# Allegro board KSZ_02v4.brd
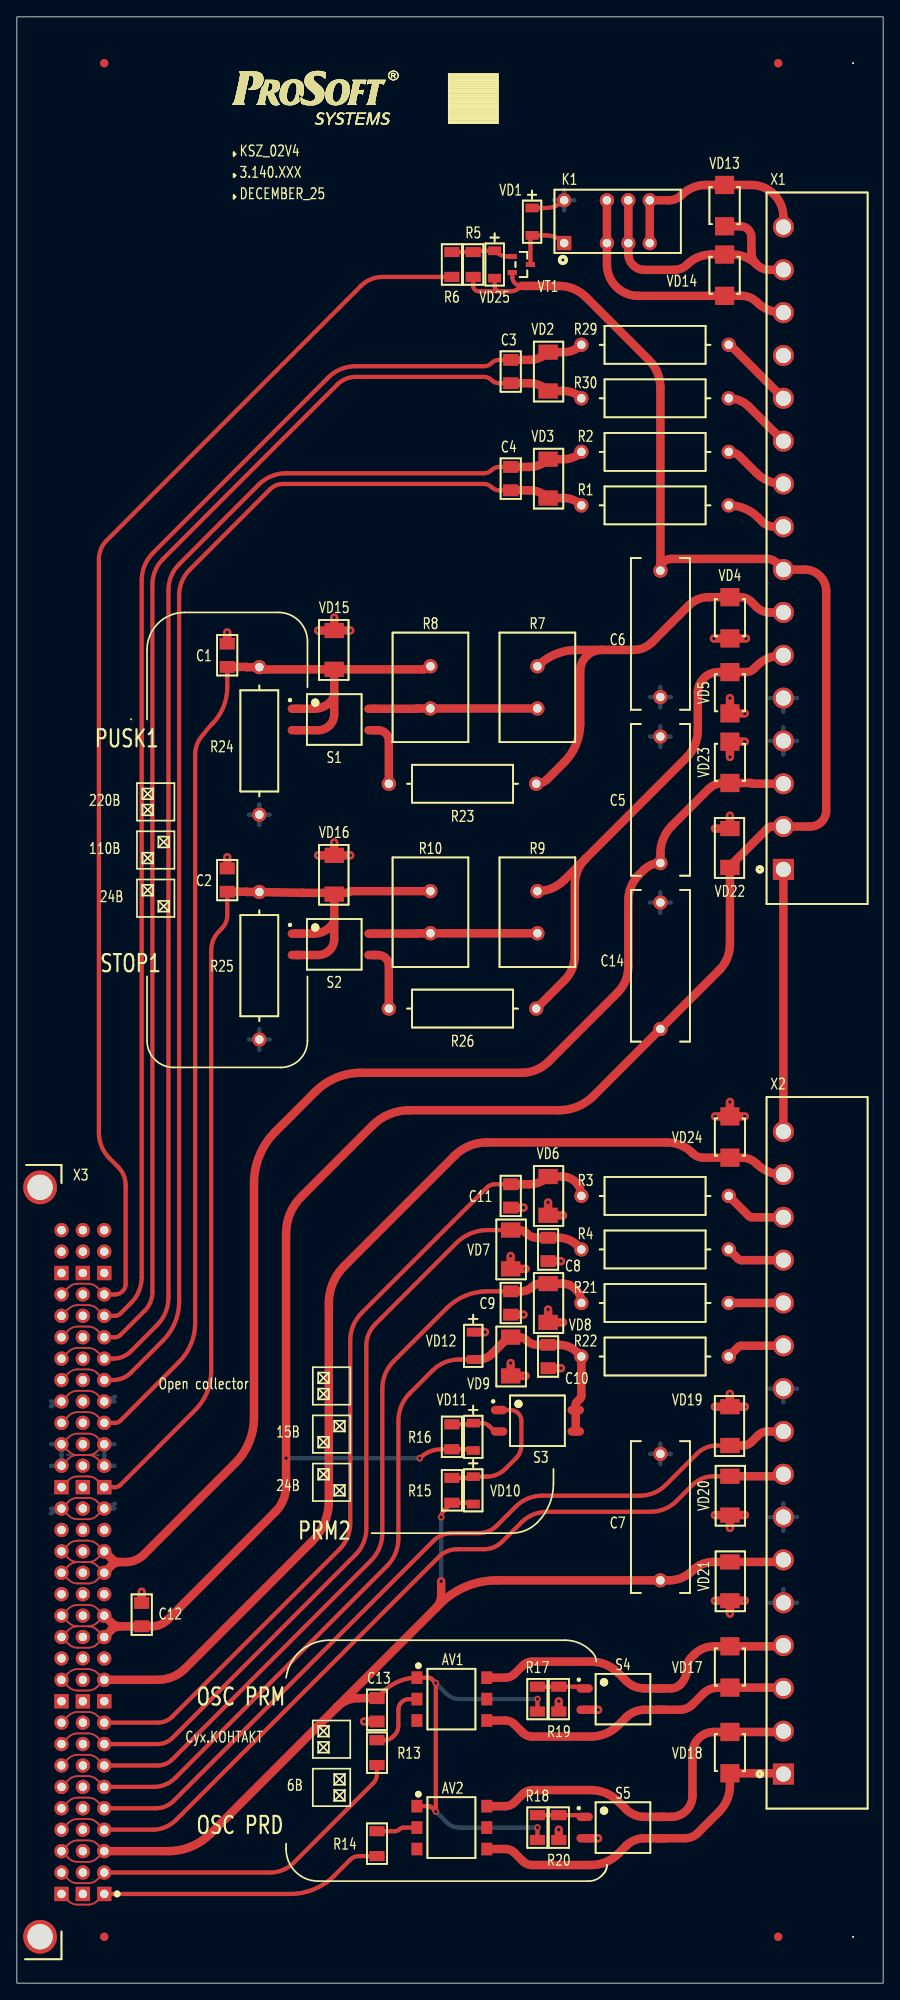
[diagram p0: board, top side]
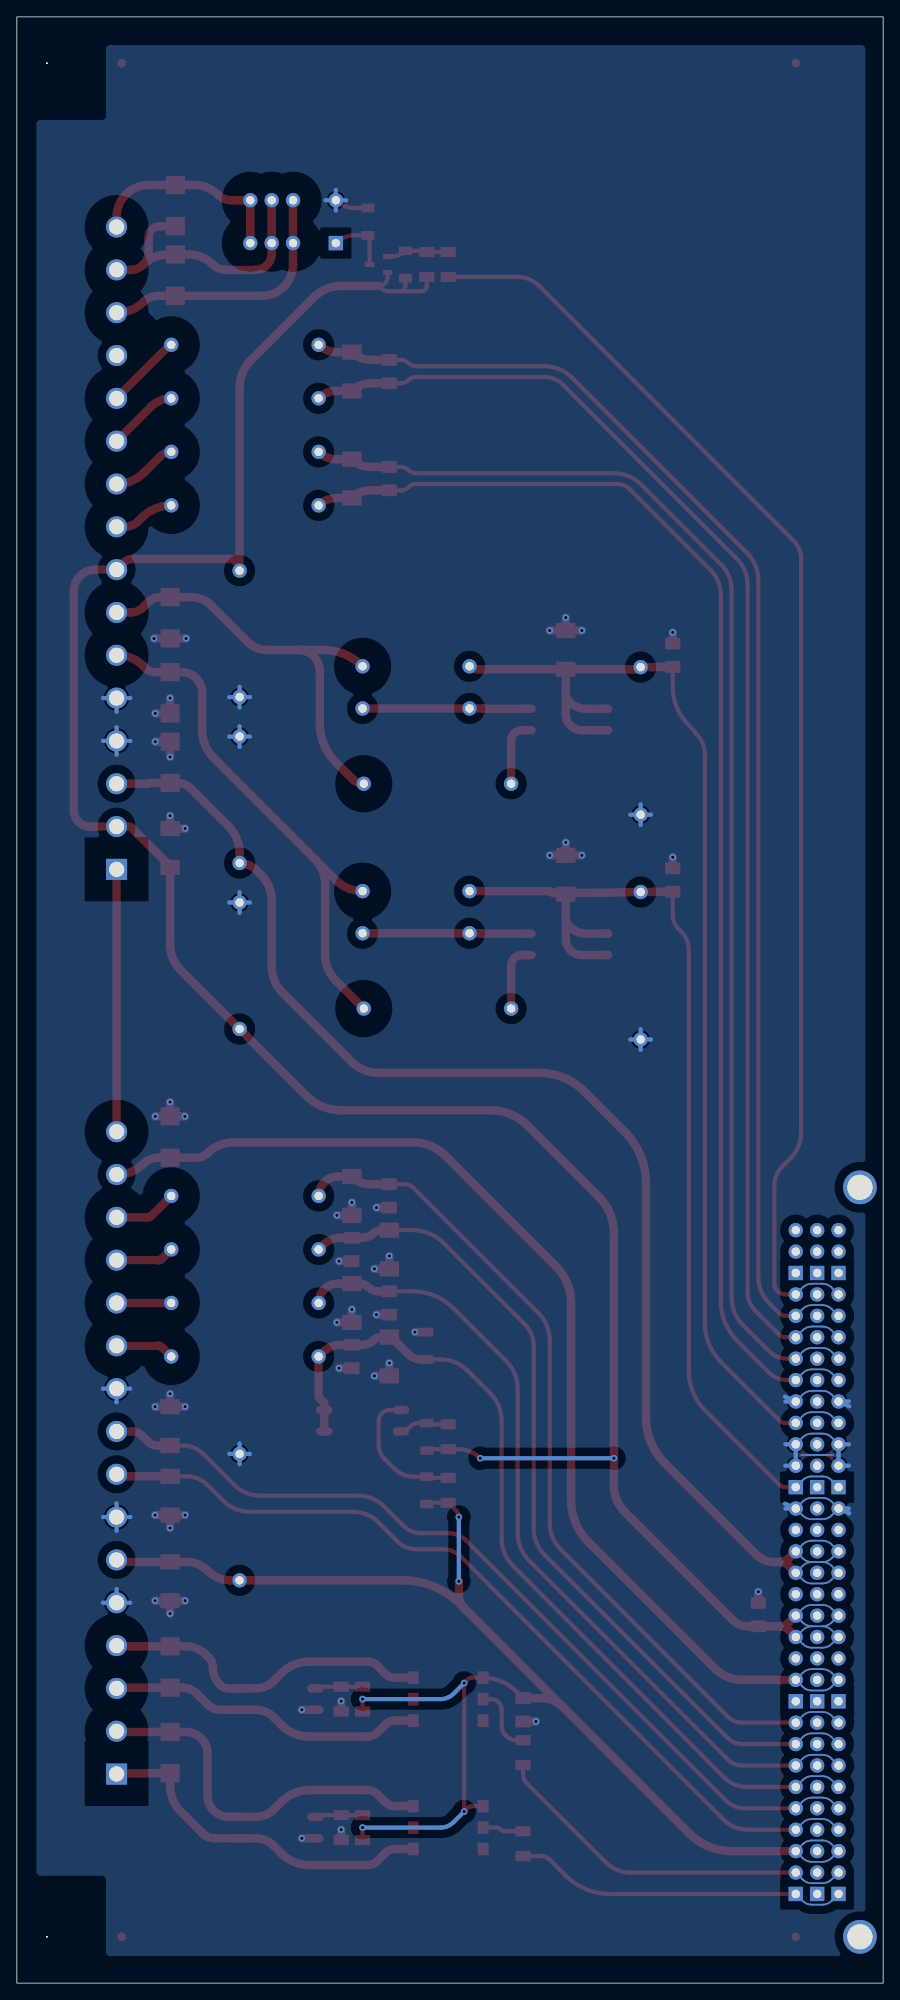
[diagram p1: board, bottom side, seen from below]

Outline 102.87 x 233.25 mm; copper layers: TOP, BOTTOM. Coordinates in mm from the lower left corner of the outline.
Outline path: rectangle 0,0 102.87,233.25

## Design rules (mm)
net group GNDK: nets GNDK
net group OUT: nets 1#RPS_C 1#RPS_NC 1#RPS_NO 1BI+ 1BI- 1MAN2 1MAN+ 1MAN- 1O_PRD+ 1O_PRD- 1O_PRM+ 1O_PRM- 1PRM2 1PUSK1 1PUSK2 1RZ-3 1STOP1 1STOP2

## Placement (name value [footprint] x y rotation side)
AV1  G3VM-351E  [SOIC254P900X365-6N]  51.66 33.69 0 top
AV2  G3VM-351E  [SOIC254P900X365-6N]  51.66 18.45 0 top
C1  0.1uF  [CAPC3216X150N]  24.98 157.52 90 top
C2  0.1uF  [CAPC3216X150N]  24.98 130.85 90 top
C3  1000pF  [CAPC3216X150N]  58.64 191.17 270 top
C4  100pF  [CAPC3216X150N]  58.64 178.47 270 top
C5  0.22uF  [CAPRR1500W80L1800T700H1250N]  76.42 140.37 90 top
C6  0.22uF  [CAPRR1500W80L1800T700H1250N]  76.42 160.06 270 top
C7  0.22uF  [CAPRR1500W80L1800T700H1250N]  76.42 55.28 90 top
C8  1000pF  [CAPC3216X150N]  63.09 87.03 270 top
C9  1000pF  [CAPC3216X150N]  58.64 80.68 270 top
C10  1000pF  [CAPC3216X150N]  63.09 74.33 270 top
C11  1000pF  [CAPC3216X150N]  58.64 93.38 270 top
C12  0.1uF  [CAPC3216X150N]  14.83 43.72 90 top
C13  0.1uF  [CAPC3216X150N]  42.77 32.42 270 top
C14  0.22uF  [CAPRR1500W80L1800T700H1250N]  76.42 120.69 90 top
DECEMBER_2017  SILK_TEXT  [TEXT]  26.26 211.49 0 top
K1  G6S224DC  [RELAY_G6S224DC]  71.34 208.95 90 top
KSZ_02V4  SILK_TEXT  [TEXT]  26.26 216.57 0 top
NOREF  -  [unnamed]  10.38 227.75 0 top
NOREF#2  -  [unnamed]  90.41 5.5 0 top
NOREF#3  -  [unnamed]  10.38 5.5 0 top
NOREF#4  -  [unnamed#2]  99.3 5.5 0 top
NOREF#5  -  [unnamed#2]  99.3 227.75 0 top
NOREF#6  -  [unnamed]  90.41 227.75 0 top
R1  100k  [RESAD1750W60L1200D450N]  75.79 175.3 0 top
R2  100k  [RESAD1750W60L1200D450N]  75.79 181.65 0 top
R3  1k  [RESAD1750W60L1200D450N]  75.79 93.38 0 top
R4  1k  [RESAD1750W60L1200D450N]  75.79 87.03 0 top
R5  47k  [RESC3216X50N]  54.2 203.87 270 top
R6  10k  [RESC3216X50N]  51.66 203.87 270 top
R7  5.1k  [RESAD500W80L1300D900N]  61.82 153.71 90 top
R8  5.1k  [RESAD500W80L1300D900N]  49.12 153.71 270 top
R9  5.1k  [RESAD500W80L1300D900N]  61.82 127.04 90 top
R10  5.1k  [RESAD500W80L1300D900N]  49.12 127.04 270 top
R13  4.7k  [RESC3216X50N]  42.77 27.34 90 top
R14  4.7k  [RESC3216X50N]  42.77 16.55 90 top
R15  10k  [RESC3216X50N]  51.66 58.46 90 top
R16  10k  [RESC3216X50N]  51.66 64.81 90 top
R17  2.2k  [RESC3216X50N]  61.82 33.69 90 top
R18  2.2k  [RESC3216X50N]  61.82 18.45 90 top
R19  1.5k  [RESC3216X50N]  64.36 33.69 90 top
R20  1.5k  [RESC3216X50N]  64.36 18.45 90 top
R21  1k  [RESAD1750W60L1200D450N]  75.79 80.68 0 top
R22  10  [RESAD1750W60L1200D450N]  75.79 74.33 0 top
R23  430  [RESAD1750W60L1200D450N]  52.93 142.28 0 top
R24  750  [RESAD1750W60L1200D450N]  28.8 147.36 90 top
R25  750  [RESAD1750W60L1200D450N]  28.8 120.69 90 top
R26  430  [RESAD1750W60L1200D450N]  52.93 115.61 0 top
R29  10k  [RESAD1750W60L1200D450N]  75.79 194.35 0 top
R30  10k  [RESAD1750W60L1200D450N]  75.79 188 0 top
S1  SmWDL-02  [SW_SMWDL-02]  37.69 149.9 0 top
S2  SmWDL-02  [SW_SMWDL-02]  37.69 123.23 0 top
S3  SmWDL-02  [SW_SMWDL-02]  61.82 66.71 0 top
S4  SmWDL-02  [SW_SMWDL-02]  71.98 33.69 0 top
S5  SmWDL-02  [SW_SMWDL-02]  71.98 18.45 0 top
SILK1  SILK_LOGO  [PROSOFT_LOGO_20X6_LINES]  24.98 219.75 0 top
SILK2  SILK_MARK  [MARKING_STICKER_6X6MM_LINES]  54.2 223.56 0 top
UNK3.140.641  SILK_TEXT  [TEXT]  26.26 214.03 0 top
VD1  LL4148  [DIOC3314X150N]  61.18 208.95 90 top
VD2  SM6T6V8CA  [DIOM5336X265N_V1]  63.09 191.17 90 top
VD3  SM6T6V8CA  [DIOM5336X265N_V1]  63.09 178.47 90 top
VD4  P6SMB300CA  [DIOM5436X230N_BI]  84.68 161.96 90 top
VD5  P6SMB300CA  [DIOM5436X230N_BI]  84.68 153.07 90 top
VD6  SM6T30CA  [DIOM5336X265N_V1]  63.09 93.38 90 top
VD7  SM6T30CA  [DIOM5336X265N_V1]  58.64 87.03 90 top
VD8  SM6T30CA  [DIOM5336X265N_V1]  63.09 80.68 90 top
VD9  SM6T30CA  [DIOM5336X265N_V1]  58.64 74.33 90 top
VD10  LL4148  [DIOC3314X150N]  54.2 58.46 90 top
VD11  LL4148  [DIOC3314X150N]  54.2 64.81 90 top
VD12  LL4148  [DIOC3314X150N]  54.2 75.6 90 top
VD13  P6SMB300CA  [DIOM5436X230N_BI]  84.04 210.86 90 top
VD14  P6SMB300CA  [DIOM5436X230N_BI]  84.04 202.6 90 top
VD15  SM6T30CA  [DIOM5336X265N_V1]  37.69 158.15 270 top
VD16  SM6T30CA  [DIOM5336X265N_V1]  37.69 131.48 270 top
VD17  P6SMB300CA  [DIOM5436X230N_BI]  84.68 37.5 90 top
VD18  P6SMB300CA  [DIOM5436X230N_BI]  84.68 27.34 90 top
VD19  SM6T30CA  [DIOM5336X265N_V1]  84.68 66.08 270 top
VD20  SM6T30CA  [DIOM5336X265N_V1]  84.68 57.82 90 top
VD21  SM6T30CA  [DIOM5336X265N_V1]  84.68 47.66 90 top
VD22  SM6T30CA  [DIOM5336X265N_V1]  84.68 134.66 270 top
VD23  P6SMB300CA  [DIOM5436X230N_BI]  84.68 144.82 270 top
VD24  P6SMB300CA  [DIOM5436X230N_BI]  84.68 100.37 270 top
VD25  LL4148  [DIOC3314X150N]  56.74 203.87 90 top
VT1  BC807-40  [SOT95P230X110-3N]  59.91 203.87 0 top
X1  231-576/001-000  [WAGO_231-576]  91.03 132.12 90 top
X2  231-576/001-000  [WAGO_231-576]  91.03 24.8 90 top
X3  09031966921  [AUK_DIN_3X32_96MR]  5.3 10.58 90 top

## Library data of the parts
AV1 AV2 = G3VM
C1-C14 = CAPACITOR
DECEMBER_2017 KSZ_02V4 UNK3.140.641 = SILK_TEXT
K1 = G6S224DC
R1-R4 R21-R26 R29 R30 = RESISTOR: alternate symbols: (RESAD375W60L505D505N)
R5-R10 R13-R20 = RESISTOR
S1-S5 = SW2
SILK1 = SILK_LOGO: alternate symbols: (PROSOFT_LOGO_3_10,PROSOFT_LOGO_30X10,PROSOFT_LOGO_50X16,PROSOFT_LOGO_60X20,PROSOFT_LOGO_70X23,PROSOFT_LOGO_80X26,PROSOFT_LOGO_92X30,PROSOFT_LOGO_20X6)
SILK2 = SILK_MARK: alternate symbols: (MARKING_STICKER_6X20MM,MARKING_STICKER_6X20MM_LINES,MARKING_STICKER_6X6MM,MARKING_STICKER_7X7MM)
VD1 VD10-VD12 VD25 = DIODE
VD2-VD9 VD13-VD24 = SUPRESSOR
VT1 = TransistorPNP
X1 X2 = CONN16
X3 = DIN96_ABC_0

## Footprints (pads in the part's own frame, mm; a bottom-side part is the same pattern mirrored in y, then rotated)
AUK_DIN_3X32_96MR
  rect 1.7x1.7 hole 1: A1(0,0) A10(22.86,0) A20(48.26,0) A30(73.66,0) B1(0,-2.54) B10(22.86,-2.54) B20(48.26,-2.54) B30(73.66,-2.54) C1(0,-5.08) C10(22.86,-5.08) C20(48.26,-5.08) C30(73.66,-5.08)
  round 1.7 hole 1: A2(2.54,0) A3(5.08,0) A4(7.62,0) A5(10.16,0) A6(12.7,0) A7(15.24,0) A8(17.78,0) A9(20.32,0) A11(25.4,0) A12(27.94,0) A13(30.48,0) A14(33.02,0) A15(35.56,0) A16(38.1,0) A17(40.64,0) A18(43.18,0) A19(45.72,0) A21(50.8,0) A22(53.34,0) A23(55.88,0) A24(58.42,0) A25(60.96,0) A26(63.5,0) A27(66.04,0) A28(68.58,0) A29(71.12,0) A31(76.2,0) A32(78.74,0) B2(2.54,-2.54) B3(5.08,-2.54) B4(7.62,-2.54) B5(10.16,-2.54) B6(12.7,-2.54) B7(15.24,-2.54) B8(17.78,-2.54) B9(20.32,-2.54) B11(25.4,-2.54) B12(27.94,-2.54) B13(30.48,-2.54) B14(33.02,-2.54) B15(35.56,-2.54) B16(38.1,-2.54) B17(40.64,-2.54) B18(43.18,-2.54) B19(45.72,-2.54) B21(50.8,-2.54) B22(53.34,-2.54) B23(55.88,-2.54) B24(58.42,-2.54) B25(60.96,-2.54) B26(63.5,-2.54) B27(66.04,-2.54) B28(68.58,-2.54) B29(71.12,-2.54) B31(76.2,-2.54) B32(78.74,-2.54) C2(2.54,-5.08) C3(5.08,-5.08) C4(7.62,-5.08) C5(10.16,-5.08) C6(12.7,-5.08) C7(15.24,-5.08) C8(17.78,-5.08) C9(20.32,-5.08) C11(25.4,-5.08) C12(27.94,-5.08) C13(30.48,-5.08) C14(33.02,-5.08) C15(35.56,-5.08) C16(38.1,-5.08) C17(40.64,-5.08) C18(43.18,-5.08) C19(45.72,-5.08) C21(50.8,-5.08) C22(53.34,-5.08) C23(55.88,-5.08) C24(58.42,-5.08) C25(60.96,-5.08) C26(63.5,-5.08) C27(66.04,-5.08) C28(68.58,-5.08) C29(71.12,-5.08) C31(76.2,-5.08) C32(78.74,-5.08)
  round 4 hole 3: SHIELD1(-5.08,2.54) SHIELD2(83.82,2.54)
CAPC3216X150N
  rect 1.4x1.8 smd: 1(-1.385,0) 2(1.385,0)
CAPRR1500W80L1800T700H1250N
  round 1.7 hole 1: 1(-7.5,0) 2(7.5,0)
DIOC3314X150N
  rect 1.025x1.55 smd: 1(-1.625,0) 2(1.625,0)
DIOM5336X265N_V1
  rect 1.8x2.3 smd: 1(-2.302,0) 2(2.302,0)
DIOM5436X230N_BI
  rect 2.16x2.26 smd: 1(-2.45,0) 2(2.45,0)
RELAY_G6S224DC
  rect 1.7x1.7 hole 1: 1(-2.54,6.35)
  round 1.7 hole 1: 3(-2.54,1.27) 4(-2.54,-1.27) 5(-2.54,-3.81) 8(2.54,-3.81) 9(2.54,-1.27) 10(2.54,1.27) 12(2.54,6.35)
RESAD500W80L1300D900N
  round 1.7 hole 1: 1(-2.5,0) 2(2.5,0)
RESAD1750W60L1200D450N
  round 1.7 hole 1: 1(-8.75,0) 2(8.75,0)
RESC3216X50N
  rect 1.2x1.8 smd: 1(-1.475,0) 2(1.475,0)
SOIC254P900X365-6N
  rect 1.3x1.5 smd: 1(-4.15,2.54) 2(-4.15,0) 3(-4.15,-2.54) 4(4.15,-2.54) 5(4.15,0) 6(4.15,2.54)
SOT95P230X110-3N
  rect 1.1x0.6 smd: 1(-1.075,0.95) 2(-1.075,-0.95) 3(1.075,0)
SW_SMWDL-02
  oval 1.95x1 smd: 1(-4.55,1.27) 2(-4.55,-1.27) 3(4.55,-1.27) 4(4.55,1.27)
unnamed
  round 1 smd: (0,0)
unnamed#2
  round 0.2 hole 2.7 unplated: (0,0)
WAGO_231-576
  rect 2.5x2.5 hole 1.8: 1(0,0)
  round 2.5 hole 1.8: 2(5.08,0) 3(10.16,0) 4(15.24,0) 5(20.32,0) 6(25.4,0) 7(30.48,0) 8(35.56,0) 9(40.64,0) 10(45.72,0) 11(50.8,0) 12(55.88,0) 13(60.96,0) 14(66.04,0) 15(71.12,0) 16(76.2,0)

## Nets
GNDK: C1.2 C2.2 C5.2 C6.2 C7.2 C8.2 C9.2 C10.2 C11.2 C12.2 C13.2 C14.2 K1.12(IN-) R19.1 R20.1 R24.1 R25.1 S4.2(A2) S5.2(A2) VD1.2(ANODE) VD4.1(ANODE) VD5.1(ANODE) VD6.1(ANODE) VD7.1(ANODE) VD8.1(ANODE) VD9.1(ANODE) VD12.2(ANODE) VD15.1(ANODE) VD16.1(ANODE) VD19.1(ANODE) VD20.1(ANODE) VD21.1(ANODE) VD22.1(ANODE) VD23.1(ANODE) VD24.1(ANODE) X1.4 X1.5 X2.5 X2.7 X2.10 X3.A19 X3.A21 X3.A22 X3.A24 X3.C19 X3.C21 X3.C22 X3.C24
1#RPS_C: K1.4(01) K1.9(02) VD13.1(ANODE) VD14.2(CATHODE) X1.15
1#RPS_NC: K1.3(NC1) K1.10(NC2) VD14.1(ANODE) X1.14
1#RPS_NO: K1.5(NO1) K1.8(NO2) VD13.2(CATHODE) X1.16
1BI+: R29.2 X1.12
1BI-: R30.2 X1.11
1MAN2: R21.2 X2.12
1MAN+: R2.2 X1.10
1MAN-: R1.2 X1.9
1O_PRD+: AV2.6 S5.4(A4) VD18.2(CATHODE) X2.2
1O_PRD-: AV2.4 S5.3(A3) VD18.1(ANODE) X2.1
1O_PRM+: AV1.6 S4.4(A4) VD17.2(CATHODE) X2.4
1O_PRM-: AV1.4 S4.3(A3) VD17.1(ANODE) X2.3
1PRM2: R22.2 X2.11
1PUSK1: R7.2 R23.2 VD4.2(CATHODE) X1.7
1PUSK2: R3.2 X2.14
1RZ-3: X1.1 X2.16
1STOP1: R9.2 R26.2 VD5.2(CATHODE) X1.6
1STOP2: R4.2 X2.13
#RPS: R6.2 X3.A29 X3.C29
+15BK: AV1.1 AV2.1 C7.1 C13.1 R15.1 R17.1 R18.1 VD10.1(CATHODE) VD21.2(CATHODE) X2.6 X3.A3 X3.C3
+24BK: C6.1 C12.1 C14.1 R5.2 R16.1 VD11.1(CATHODE) VD22.2(CATHODE) VD25.1(CATHODE) VT1.2(E) X1.2 X1.8 X3.A13 X3.A14 X3.C13 X3.C14
+100BK: C5.1 VD23.2(CATHODE) X1.3 X3.A16 X3.A17 X3.C16 X3.C17
+BI: C3.1 R29.1 VD2.2(CATHODE) X3.A28 X3.C28
+MAN: C4.1 R2.1 VD3.2(CATHODE) X3.A26 X3.C26
+ZPR: VD19.2(CATHODE) X2.9 X3.A5 X3.C5
-BI: C3.2 R30.1 VD2.1(ANODE) X3.A27 X3.C27
-MAN: C4.2 R1.1 VD3.1(ANODE) X3.A25 X3.C25
-RZ-2: VD24.2(CATHODE) X2.15 X3.A11 X3.C11
-ZPR: VD20.2(CATHODE) X2.8 X3.A4 X3.C4
MAN2: C9.1 R21.1 VD8.2(CATHODE) X3.A7 X3.C7
O_PRD: R14.1 X3.A1 X3.C1
O_PRM: R13.1 X3.A2 X3.C2
PRM2: C10.1 R22.1 S3.3(A3) S3.4(A4) VD9.2(CATHODE) VD12.1(CATHODE) X3.A6 X3.C6
PUSK1: C1.1 R8.1 R24.2 S1.1(A1) S1.2(A2) VD15.2(CATHODE) X3.A23 X3.C23
PUSK2: C11.1 R3.1 VD6.2(CATHODE) X3.A9 X3.C9
STOP1: C2.1 R10.1 R25.2 S2.1(A1) S2.2(A2) VD16.2(CATHODE) X3.A20 X3.C20
STOP2: C8.1 R4.1 VD7.2(CATHODE) X3.A8 X3.C8
N205916: R18.2 R20.2 S5.1(A1)
N206064: AV2.2 R14.2
N208529: R17.2 R19.2 S4.1(A1)
N208613: AV1.2 R13.2
N217263: R15.2 S3.1(A1) VD10.2(ANODE)
N217275: R16.2 S3.2(A2) VD11.2(ANODE)
N235918: K1.1(IN+) VD1.1(CATHODE) VT1.3(C)
N246818: R7.1 R8.2 S1.4(A4)
N246834: R23.1 S1.3(A3)
N252394: R9.1 R10.2 S2.4(A4)
N252398: R26.1 S2.3(A3)
N261995: R5.1 R6.1 VD25.2(ANODE) VT1.1(B)

Pads without a net: AV1 3 5; AV2 3 5; X1 13; X3 A10 A12 A15 A18 A30 A31 A32 B1 B2 B3 B4 B5 B6 B7 B8 B9 B10 B11 B12 B13 B14 B15 B16 B17 B18 B19 B20 B21 B22 B23 B24 B25 B26 B27 B28 B29 B30 B31 B32 C10 C12 C15 C18 C30 C31 C32 SHIELD1 SHIELD2

## Via types
v1: diameter 0.8, hole 0.4, TOP to BOTTOM, 55 vias

## Routing (per net, layer and track width the routed paths; a pad name or vN(x,y) marks a point on that pad's centre or on a via; arc(x,y) is an arc through that point)
GNDK: length 226.2
  TOP w0.2: X3.C21 9.56,62.2 arc(9.06,62.53) 8.48,62.65 ; 7.21,62.65 8.48,62.65 ; 7.21,62.65 arc(6.62,62.53) 6.12,62.2 X3.A21 ; 7.21,62.65 arc(6.62,62.77) 6.12,63.1 X3.A22 6.12,64.74 arc(6.62,65.07) 7.21,65.19 8.48,65.19 arc(9.06,65.07) 9.56,64.74 X3.C22 9.56,63.1 arc(9.06,62.77) 8.48,62.65 ; X3.C24 9.56,69.82 arc(9.06,70.15) 8.48,70.27 7.21,70.27 arc(6.62,70.15) 6.12,69.82 X3.A24 ; 8.48,57.57 7.21,57.57 arc(6.62,57.45) 6.12,57.12 X3.A19 6.12,55.48 arc(6.62,55.15) 7.21,55.03 8.48,55.03 arc(9.06,55.15) 9.56,55.48 X3.C19 9.56,57.12 arc(9.06,57.45) 8.48,57.57
  TOP w0.5: VD1.2 62.78,210.58 arc(63.98,210.82) 64.99,211.49
  TOP w1: v1(84.68,145.45) VD23.1 v1(86.43,147.27) ; S4.2 v1(69.03,32.42) ; VD24.1 v1(84.68,104.53) ; VD24.1 v1(82.92,102.82) ; VD24.1 v1(86.43,102.82) ; VD20.1 v1(86.45,55.52) ; VD20.1 v1(84.68,53.99) ; VD20.1 v1(82.9,55.52) ; VD16.1 v1(35.78,133.79) ; VD16.1 v1(39.59,133.79) ; VD16.1 v1(37.69,135.31) ; v1(64.86,78.38) VD8.1 v1(63.09,79.91) ; VD21.1 v1(82.9,45.36) ; VD21.1 v1(86.45,45.36) ; VD21.1 v1(84.68,43.83) ; v1(58.64,86.26) VD7.1 v1(60.42,84.73) ; C9.2 v1(60.17,79.3) ; VD15.1 v1(35.78,160.46) ; VD15.1 v1(37.69,161.98) ; VD15.1 v1(39.59,160.46) ; v1(82.9,136.96) 84.68,136.96 v1(84.68,138.49) ; VD19.1 v1(86.45,68.38) ; VD19.1 v1(82.9,68.38) ; VD19.1 v1(84.68,69.91) ; v1(84.68,152.44) VD5.1 v1(86.43,150.62) ; v1(64.86,91.08) VD6.1 v1(63.09,92.61) ; C13.2 v1(41.24,31.04) ; R20.1 v1(64.36,18.21) ; S5.2 v1(69.03,17.18) ; v1(82.77,159.51) VD4.1 v1(86.58,159.51) ; C2.2 v1(24.98,133.56) ; C10.2 v1(64.61,72.95) ; C8.2 v1(64.61,85.65) ; C1.2 v1(24.98,160.23) ; v1(60.42,72.03) VD9.1 v1(58.64,73.56) ; C11.2 v1(60.17,92) ; VD12.2 v1(55.6,77.23) ; R19.1 v1(64.36,33.45) ; C12.2 v1(14.83,46.43)
  BOTTOM w0.2: X3.C24 9.56,69.82 arc(9.06,70.15) 8.48,70.27 7.21,70.27 arc(6.62,70.15) 6.12,69.82 X3.A24 ; X3.A22 6.12,64.74 arc(6.62,65.07) 7.21,65.19 8.48,65.19 arc(9.06,65.07) 9.56,64.74 X3.C22 ; 5.94,62.65 9.75,62.65 ; 7.21,55.03 8.48,55.03 arc(9.06,55.15) 9.56,55.48 X3.C19 9.56,57.12 arc(9.06,57.45) 8.48,57.57 7.21,57.57 arc(6.62,57.45) 6.12,57.12 X3.A19 6.12,55.48 arc(6.62,55.15) 7.21,55.03
  BOTTOM w0.5: 75.19,128.19 C14.2 ; C14.2 76.42,126.96 ; C14.2 76.42,129.42 ; C14.2 77.65,128.19 ; C7.2 76.42,64.01 ; C7.2 76.42,61.56 ; C7.2 75.19,62.78 ; C7.2 77.65,62.78 ; 11.61,63.92 X3.C22 10.38,62.69 ; 76.42,151.33 C6.2 ; C6.2 76.42,153.79 ; C6.2 77.65,152.56 ; C6.2 75.19,152.56 ; 75.19,147.87 C5.2 ; C5.2 77.65,147.87 ; C5.2 76.42,146.65 ; C5.2 76.42,149.1 ; 91.03,53.66 X2.7 ; X2.7 92.65,55.28 ; X2.7 91.03,56.91 ; X2.7 89.4,55.28 ; 91.03,152.44 92.65,152.44 ; 91.03,152.44 89.4,152.44 ; 91.03,152.44 91.03,150.81 ; 91.03,147.36 91.03,148.99 ; 91.03,147.36 92.65,147.36 ; 91.03,147.36 91.03,145.73 ; 91.03,147.36 89.4,147.36 ; 11.61,61.38 X3.C21 10.38,62.61 ; 89.4,45.12 X2.5 ; X2.5 92.65,45.12 ; X2.5 91.03,46.75 ; R25.1 30.02,111.94 ; R25.1 28.8,110.71 ; R25.1 27.57,111.94 ; R25.1 28.8,113.17 ; 4.07,61.38 X3.A21 5.3,62.61 ; 4.07,56.3 X3.A19 4.02,55.73 ; 11.61,69 X3.C24 11.66,69.57 ; 64.99,210.27 64.99,211.49 ; 64.99,211.49 63.76,211.49 ; 64.99,211.49 64.99,212.72 ; 64.99,211.49 66.22,211.49 ; R24.1 28.8,139.84 ; R24.1 27.57,138.61 ; R24.1 28.8,137.38 ; R24.1 30.02,138.61 ; 4.07,63.92 X3.A22 5.3,62.69 ; 91.03,68.9 X2.10 ; X2.10 92.65,70.52 ; X2.10 89.4,70.52 ; 4.07,69 X3.A24 4.02,68.43 ; 11.66,56.87 X3.C19 11.61,56.3
1#RPS_C: length 34.2
  TOP w1: X1.15 89.38,203.24 arc(88.55,203.4) 87.85,203.87 ; 84.04,208.41 85.95,208.41 arc(86.84,208.04) 87.22,207.14 87.22,205.41 arc(87.38,204.58) 87.85,203.87 ; K1.9 K1.4 72.61,205.14 arc(73.17,203.8) 74.52,203.24 78.06,203.24 arc(78.89,203.4) 79.59,203.87 arc(80.9,204.75) 82.44,205.05 VD14.2 85,205.05 arc(86.54,204.75) 87.85,203.87
1#RPS_NC: length 31.2
  TOP w1: X1.14 90.92,198.16 arc(89.26,198.49) 87.85,199.43 arc(87.05,199.97) 86.1,200.15 VD14.1 73.79,200.15 arc(71.16,201.24) 70.07,203.87 K1.3 K1.10
1#RPS_NO: length 24.8
  TOP w1: 75.15,206.41 75.15,211.49 77.43,211.49 arc(78.26,211.66) 78.96,212.13 arc(80.27,213) 81.81,213.31 VD13.2 87.22,213.31 arc(89.91,212.19) 91.03,209.5 X1.16
1BI+: length 9.1
  TOP w1: X1.12 84.77,194.25 arc(84.66,194.32) R29.2
1BI-: length 8.4
  TOP w1: X1.11 86.94,187 arc(85.84,187.74) R30.2
1MAN2: length 6.5
  TOP w1: X2.12 R21.2
1MAN+: length 7.8
  TOP w1: X1.10 arc(89.27,178.19) 87.77,179.19 85.86,181.1 arc(85.25,181.51) R2.2
1MAN-: length 7.2
  TOP w1: 91.03,172.76 90.02,172.76 arc(89.19,172.92) 88.48,173.39 88.03,173.85 arc(86.42,174.92) R1.2
1O_PRD+: length 44.8
  TOP w1: X2.2 90.94,29.79 VD18.2 82.77,29.79 arc(80.97,29.05) 80.23,27.25 80.23,22.26 arc(79.49,20.47) 77.69,19.72 S5.4 74.52,19.72 arc(73.34,19.96) 72.35,20.62 71.42,21.55 arc(69.92,22.55) 68.17,22.9 61.18,22.9 arc(60.59,22.78) 60.1,22.45 59.09,21.44 arc(58.59,21.11) 58.01,20.99 AV2.6
1O_PRD-: length 41.7
  TOP w1: AV2.4 58.01,15.91 arc(58.59,15.8) 59.09,15.46 60.1,14.46 arc(60.59,14.13) 61.18,14.01 68.17,14.01 arc(69.92,14.36) 71.42,15.36 72.35,16.29 arc(73.34,16.95) 74.52,17.18 S5.3 79.33,17.18 arc(80.16,17.35) 80.87,17.82 83.41,20.36 arc(84.34,21.77) 84.68,23.42 VD18.1 90.94,24.89 X2.1
1O_PRM+: length 39.7
  TOP w1: X2.4 90.94,39.95 VD17.2 82.77,39.95 arc(81.51,39.7) 80.45,38.99 80.04,38.59 arc(79.71,38.09) 79.59,37.5 79.59,37.39 arc(79.38,36.32) 78.77,35.41 arc(78.28,35.08) 77.69,34.96 S4.4 74.52,34.96 arc(73.34,35.2) 72.35,35.86 71.42,36.79 arc(69.92,37.79) 68.17,38.14 61.18,38.14 arc(60.59,38.02) 60.1,37.69 59.09,36.68 arc(58.59,36.35) 58.01,36.23 AV1.6
1O_PRM-: length 37.8
  TOP w1: X2.3 90.94,35.05 VD17.1 83.25,35.05 arc(82.3,34.87) 81.5,34.33 80.23,33.06 arc(79.53,32.59) 78.7,32.42 S4.3 74.52,32.42 arc(73.34,32.19) 72.35,31.53 71.42,30.6 arc(69.92,29.6) 68.17,29.25 61.18,29.25 arc(60.59,29.37) 60.1,29.7 59.09,30.7 arc(58.59,31.04) 58.01,31.15 AV1.4
1PRM2: length 7
  TOP w1: X2.11 86.01,75.6 arc(85.82,75.57) 85.66,75.46 R22.2
1PUSK1: length 52.2
  TOP w1: 69.44,158.15 66.51,158.15 arc(63.97,157.65) R7.2 ; 69.44,158.15 73.25,158.15 arc(74.42,158.39) 75.41,159.05 79.81,163.45 arc(80.88,164.16) 82.14,164.41 VD4.2 85.95,164.41 arc(86.61,164.28) 87.18,163.9 87.85,163.23 arc(88.55,162.76) 89.38,162.6 X1.7 ; 69.44,158.15 arc(67.64,157.41) 66.9,155.61 66.9,149.42 arc(66.4,146.93) 64.99,144.82 63,142.83 arc(62.39,142.42) R23.2
1PUSK2: length 7.5
  TOP w1: X2.14 87.28,90.84 arc(87.09,90.88) 86.93,90.99 R3.2
1RZ-3: length 31.1
  TOP w1: X1.1 X2.16
1STOP1: length 64.1
  TOP w1: 67.53,133.39 65,130.86 arc(63.54,129.88) R9.2 ; 67.53,133.39 79.52,145.38 arc(80.51,146.87) 80.87,148.63 80.87,153.07 arc(81.58,154.81) 83.32,155.52 VD5.2 86.58,155.52 arc(87.08,155.62) 87.51,155.91 87.85,156.25 arc(89.26,157.19) 90.92,157.52 X1.6 ; 67.53,133.39 arc(66.59,131.98) 66.26,130.32 66.26,121.96 arc(65.94,120.33) 65.01,118.95 R26.2
1STOP2: length 7
  TOP w1: X2.13 86.01,85.76 arc(85.82,85.8) 85.66,85.91 R4.2
#RPS: length 158.5
  TOP w0.2: X3.C29 9.56,82.52 arc(9.06,82.85) 8.48,82.97 7.21,82.97 arc(6.62,82.85) 6.12,82.52 X3.A29
  TOP w0.5: R6.2 43.43,202.4 arc(42.04,202.12) 40.86,201.33 10.64,171.12 arc(9.98,170.12) 9.75,168.95 9.75,100.89 arc(10.08,99.24) 11.02,97.83 12.02,96.82 arc(12.69,95.83) 12.92,94.65 12.92,82.95 arc(12.55,82.07) 11.67,81.7 X3.C29
  BOTTOM w0.2: X3.C29 9.56,82.52 arc(9.06,82.85) 8.48,82.97 7.21,82.97 arc(6.62,82.85) 6.12,82.52 X3.A29
+15BK: length 192.8
  TOP w0.2: 6.12,16.48 X3.A3 6.12,14.84 arc(6.62,14.51) 7.21,14.39 8.48,14.39 arc(9.06,14.51) 9.56,14.84 X3.C3 9.56,16.48 arc(9.06,16.81) 8.48,16.93 7.21,16.93 arc(6.62,16.81) 6.12,16.48
  TOP w0.5: R18.1 v1(61.82,18.45) ; AV2.1 48.91,20.99 arc(49.1,20.96) 49.26,20.85 v1(49.75,20.36) v1(49.75,35.6) 49.26,36.09 arc(49.1,36.2) 48.91,36.23 AV1.1 arc(45.37,35.81) 43.55,34.6 C13.1 ; R17.1 v1(61.82,33.69) ; VD10.1 arc(54.03,56.95) 53.83,56.98 R15.1 50.69,56.02 arc(50.46,55.68) v1(50.39,55.28)
  TOP w1: 38,32.74 23.08,17.82 22.99,17.72 arc(20.7,16.2) 18,15.66 X3.C3 ; 38,32.74 49.75,44.49 ; 38,32.74 arc(39.18,33.53) 40.58,33.81 C13.1 ; 49.75,44.49 50.24,44.98 arc(53.35,47.05) 57.01,47.78 C7.1 77.45,47.78 arc(78.96,48.08) 80.23,48.93 arc(81.37,49.7) 82.72,49.97 VD21.2 90.45,49.97 arc(90.76,50.03) X2.6 ; 49.75,44.49 arc(50.22,45.19) 50.39,46.02 v1(50.39,47.66)
  BOTTOM w0.2: 6.12,16.48 X3.A3 6.12,14.84 arc(6.62,14.51) 7.21,14.39 8.48,14.39 arc(9.06,14.51) 9.56,14.84 X3.C3 9.56,16.48 arc(9.06,16.81) 8.48,16.93 7.21,16.93 arc(6.62,16.81) 6.12,16.48
  BOTTOM w0.5: v1(49.75,35.6) 51.02,34.33 arc(51.72,33.86) 52.55,33.69 v1(61.82,33.69) ; v1(50.39,55.28) v1(50.39,47.66) ; v1(49.75,20.36) 51.02,19.09 arc(51.72,18.62) 52.55,18.45 v1(61.82,18.45)
+24BK: length 326
  TOP w0.2: 7.21,42.33 8.48,42.33 ; 7.21,42.33 arc(6.62,42.45) 6.12,42.78 X3.A14 6.12,44.42 arc(6.62,44.75) 7.21,44.87 8.48,44.87 arc(9.06,44.75) 9.56,44.42 X3.C14 9.56,42.78 arc(9.06,42.45) 8.48,42.33 ; 7.21,42.33 arc(6.62,42.21) 6.12,41.88 X3.A13 6.12,40.24 arc(6.62,39.91) 7.21,39.79 8.48,39.79 arc(9.06,39.91) 9.56,40.24 X3.C13 9.56,41.88 arc(9.06,42.21) 8.48,42.33
  TOP w0.5: VD25.1 56.74,201.33 arc(56.92,200.88) 57.37,200.7 ; 57.37,200.7 54.83,200.7 arc(54.38,200.88) 54.2,201.33 R5.2 ; 57.37,200.7 58.64,200.7 arc(59.23,200.82) 59.72,201.15 59.91,201.33 arc(59.15,201.65) 58.84,202.41 VT1.2 ; VD11.1 arc(54.03,63.3) 53.83,63.33 R16.1 50.42,63.33 arc(49.02,63.06) v1(47.85,62.27)
  TOP w1: C6.1 76.42,167.68 ; 76.42,167.68 76.42,189.27 arc(76.07,191.03) 75.07,192.52 67.61,199.99 arc(66.11,200.98) 64.36,201.33 59.91,201.33 ; 76.42,167.68 arc(76.79,168.58) 77.69,168.95 89.12,168.95 arc(89.71,168.83) 90.2,168.5 X1.8 93.57,167.68 arc(95.36,166.94) 96.11,165.14 96.11,139.1 arc(95.55,137.76) 94.2,137.2 X1.2 89.57,137.2 arc(89.38,137.16) 89.22,137.05 84.68,132.51 VD22.2 84.68,123.23 arc(84.35,121.58) 83.41,120.18 C14.1 68.49,105.25 arc(66.59,103.99) 64.36,103.54 46.58,103.54 arc(44.23,103.08) 42.24,101.75 33.77,93.28 arc(32.44,91.29) 31.97,88.94 v1(31.97,62.27) 31.97,58.99 arc(31.64,57.33) 30.7,55.92 17.83,43.05 arc(17.03,42.52) 16.09,42.33 C12.1 12.29,42.33 ; 12.29,42.33 arc(11.7,42.21) 11.2,41.88 X3.C13 ; 12.29,42.33 arc(11.7,42.45) 11.2,42.78 X3.C14
  BOTTOM w0.2: 7.21,42.33 8.48,42.33 ; 7.21,42.33 arc(6.62,42.45) 6.12,42.78 X3.A14 6.12,44.42 arc(6.62,44.75) 7.21,44.87 8.48,44.87 arc(9.06,44.75) 9.56,44.42 X3.C14 9.56,42.78 arc(9.06,42.45) 8.48,42.33 ; 7.21,42.33 arc(6.62,42.21) 6.12,41.88 X3.A13 6.12,40.24 arc(6.62,39.91) 7.21,39.79 8.48,39.79 arc(9.06,39.91) 9.56,40.24 X3.C13 9.56,41.88 arc(9.06,42.21) 8.48,42.33
  BOTTOM w0.5: v1(31.97,62.27) v1(47.85,62.27)
+100BK: length 193.8
  TOP w0.2: 7.21,49.95 8.48,49.95 ; 7.21,49.95 arc(6.62,49.83) 6.12,49.5 X3.A16 6.12,47.86 arc(6.62,47.53) 7.21,47.41 8.48,47.41 arc(9.06,47.53) 9.56,47.86 X3.C16 9.56,49.5 arc(9.06,49.83) 8.48,49.95 ; 7.21,49.95 arc(6.62,50.07) 6.12,50.4 X3.A17 6.12,52.04 arc(6.62,52.37) 7.21,52.49 8.48,52.49 arc(9.06,52.37) 9.56,52.04 X3.C17 9.56,50.4 arc(9.06,50.07) 8.48,49.95
  TOP w1: 12.29,49.95 12.92,49.95 arc(14.09,50.18) 15.09,50.85 25.92,61.67 arc(27.58,64.16) 28.16,67.09 28.16,94.87 arc(28.82,98.19) 30.7,101 35.44,105.74 arc(37.93,107.41) 40.86,107.99 59.91,107.99 arc(61.67,108.34) 63.16,109.34 71.34,117.51 arc(72.28,118.92) 72.61,120.58 72.61,128.42 arc(72.94,130.08) 73.88,131.48 74.46,132.06 arc(75.36,132.66) C5.1 76.42,134.02 arc(76.77,135.78) 77.77,137.28 82.14,141.64 arc(82.94,142.18) 83.89,142.37 VD23.2 87.22,142.37 87.31,142.28 X1.3 ; 12.29,49.95 arc(11.7,49.83) 11.2,49.5 X3.C16 ; 12.29,49.95 arc(11.7,50.07) 11.2,50.4 X3.C17
  BOTTOM w0.2: 7.21,49.95 8.48,49.95 ; 7.21,49.95 arc(6.62,50.07) 6.12,50.4 X3.A17 6.12,52.04 arc(6.62,52.37) 7.21,52.49 8.48,52.49 arc(9.06,52.37) 9.56,52.04 X3.C17 9.56,50.4 arc(9.06,50.07) 8.48,49.95 ; 7.21,49.95 arc(6.62,49.83) 6.12,49.5 X3.A16 6.12,47.86 arc(6.62,47.53) 7.21,47.41 8.48,47.41 arc(9.06,47.53) 9.56,47.86 X3.C16 9.56,49.5 arc(9.06,49.83) 8.48,49.95
+BI: length 166
  TOP w0.2: X3.C28 9.56,79.98 arc(9.06,80.31) 8.48,80.43 7.21,80.43 arc(6.62,80.31) 6.12,79.98 X3.A28
  TOP w0.5: C3.1 57.28,192.56 arc(56.79,192.46) 56.37,192.18 arc(55.95,191.91) 55.47,191.81 40.23,191.81 arc(38.47,191.46) 36.97,190.46 16.17,169.66 arc(15.18,168.17) 14.83,166.41 14.83,83.75 arc(14.49,82.09) 13.56,80.68 12.29,79.41 arc(12,79.23) 11.67,79.16 X3.C28
  TOP w1: C3.1 60.87,192.56 arc(62.07,192.8) VD2.2 64.93,193.48 arc(66.07,193.7) R29.1
  BOTTOM w0.2: X3.A28 6.12,79.98 arc(6.62,80.31) 7.21,80.43 8.48,80.43 arc(9.06,80.31) 9.56,79.98 X3.C28
+MAN: length 163.5
  TOP w0.2: X3.A26 6.12,74.9 arc(6.62,75.23) 7.21,75.35 8.48,75.35 arc(9.06,75.23) 9.56,74.9 X3.C26
  TOP w0.5: 58.64,179.86 57.28,179.86 arc(56.79,179.76) 56.37,179.48 arc(55.95,179.21) 55.47,179.11 31.97,179.11 arc(30.21,178.76) 28.72,177.76 19.27,168.31 arc(18.33,166.91) 18,165.25 18,81.32 arc(17.65,79.56) 16.65,78.07 13.56,74.97 arc(12.57,74.31) 11.41,74.08 X3.C26
  TOP w1: 58.64,179.86 60.87,179.86 arc(62.07,180.1) VD3.2 64.93,180.78 arc(66.07,181) R2.1
  BOTTOM w0.2: X3.C26 9.56,74.9 arc(9.06,75.23) 8.48,75.35 7.21,75.35 arc(6.62,75.23) 6.12,74.9 X3.A26
+ZPR: length 110.1
  TOP w0.2: X3.C5 9.56,21.56 arc(9.06,21.89) 8.48,22.01 7.21,22.01 arc(6.62,21.89) 6.12,21.56 X3.A5
  TOP w0.5: VD19.2 83.09,63.78 arc(81.84,63.53) 80.78,62.82 77.06,59.09 arc(75.65,58.15) 73.99,57.82 62.34,57.82 arc(60.68,57.49) 59.28,56.55 57,54.28 arc(56,53.61) 54.83,53.38 51.66,53.38 arc(50.48,53.15) 49.49,52.48 18.64,21.63 arc(17.65,20.97) 16.49,20.74 X3.C5
  TOP w1: X2.9 89.12,65.44 arc(88.53,65.33) 88.04,65 87.22,64.17 arc(86.78,63.88) 86.26,63.78 VD19.2
  BOTTOM w0.2: X3.C5 9.56,21.56 arc(9.06,21.89) 8.48,22.01 7.21,22.01 arc(6.62,21.89) 6.12,21.56 X3.A5
-BI: length 167
  TOP w0.2: X3.C27 9.56,77.44 arc(9.06,77.77) 8.48,77.89 7.21,77.89 arc(6.62,77.77) 6.12,77.44 X3.A27
  TOP w0.5: C3.2 57.28,189.79 arc(56.79,189.89) 56.37,190.16 arc(55.95,190.44) 55.47,190.54 40.23,190.54 arc(39.05,190.31) 38.06,189.64 17.37,168.95 arc(16.43,167.54) 16.09,165.88 16.09,81.95 arc(15.86,80.78) 15.2,79.79 12.29,76.87 arc(12,76.69) 11.67,76.62 X3.C27
  TOP w1: C3.2 60.87,189.79 arc(62.07,189.55) VD2.1 64.93,188.87 arc(66.07,188.65) R30.1
  BOTTOM w0.2: X3.A27 6.12,77.44 arc(6.62,77.77) 7.21,77.89 8.48,77.89 arc(9.06,77.77) 9.56,77.44 X3.C27
-MAN: length 164.4
  TOP w0.2: X3.A25 6.12,72.36 arc(6.62,72.69) 7.21,72.81 8.48,72.81 arc(9.06,72.69) 9.56,72.36 X3.C25
  TOP w0.5: C4.2 57.28,177.09 arc(56.79,177.19) 56.37,177.46 arc(55.95,177.74) 55.47,177.84 31.6,177.84 arc(30.77,177.67) 30.07,177.2 20.54,167.68 arc(19.6,166.27) 19.27,164.61 19.27,80.84 arc(18.77,78.35) 17.37,76.24 13.56,72.43 arc(12.57,71.77) 11.41,71.54 X3.C25
  TOP w1: C4.2 60.87,177.09 arc(62.07,176.85) VD3.1 64.93,176.17 arc(66.07,175.95) R1.1
  BOTTOM w0.2: X3.C25 9.56,72.36 arc(9.06,72.69) 8.48,72.81 7.21,72.81 arc(6.62,72.69) 6.12,72.36 X3.A25
-RZ-2: length 148
  TOP w0.2: 9.56,35.16 X3.C11 9.56,36.8 arc(9.06,37.13) 8.48,37.25 7.21,37.25 arc(6.62,37.13) 6.12,36.8 X3.A11 6.12,35.16 arc(6.62,34.83) 7.21,34.71 8.48,34.71 arc(9.06,34.83) 9.56,35.16
  TOP w1: X3.C11 16.73,35.98 arc(18.49,36.33) 19.98,37.33 34.83,52.17 35.07,52.42 arc(36.54,54.61) 37.05,57.19 37.05,80.68 arc(37.52,83.03) 38.85,85.02 51.97,98.15 arc(53.73,99.32) 55.81,99.73 77.16,99.73 arc(78.82,99.4) 80.23,98.46 arc(80.83,98.06) 81.55,97.92 VD24.2 86.1,97.92 arc(87.05,97.73) 87.85,97.19 arc(89.26,96.25) 90.92,95.92 X2.15
  BOTTOM w0.2: 6.12,36.8 X3.A11 6.12,35.16 arc(6.62,34.83) 7.21,34.71 8.48,34.71 arc(9.06,34.83) 9.56,35.16 X3.C11 9.56,36.8 arc(9.06,37.13) 8.48,37.25 7.21,37.25 arc(6.62,37.13) 6.12,36.8
-ZPR: length 109.1
  TOP w0.2: X3.A4 6.12,19.02 arc(6.62,19.35) 7.21,19.47 8.48,19.47 arc(9.06,19.35) 9.56,19.02 X3.C4
  TOP w0.5: X3.C4 16.09,18.2 arc(17.62,18.5) 18.91,19.37 19.27,19.72 50.12,50.58 arc(51.12,51.24) 52.29,51.47 55.47,51.47 arc(56.64,51.71) 57.63,52.37 59.91,54.65 arc(61.32,55.59) 62.98,55.92 75.26,55.92 arc(76.92,56.25) 78.33,57.19 80.24,59.1 arc(81.37,59.86) 82.71,60.13 VD20.2
  TOP w1: VD20.2 90.45,60.13 arc(90.76,60.19) X2.8
  BOTTOM w0.2: X3.A4 6.12,19.02 arc(6.62,19.35) 7.21,19.47 8.48,19.47 arc(9.06,19.35) 9.56,19.02 X3.C4
MAN2: length 105
  TOP w0.2: X3.A7 6.12,26.64 arc(6.62,26.97) 7.21,27.09 8.48,27.09 arc(9.06,26.97) 9.56,26.64 X3.C7
  TOP w0.5: X3.C7 16.73,25.82 arc(17.67,26.01) 18.47,26.54 18.64,26.71 42.05,50.13 arc(43.05,51.62) 43.4,53.38 43.4,70.52 arc(43.75,72.28) 44.75,73.78 51.02,80.05 arc(53.26,81.54) 55.9,82.07 C9.1
  TOP w1: C9.1 59.93,82.07 arc(60.6,82.2) 61.18,82.59 arc(61.62,82.88) 62.14,82.99 VD8.2 64.73,82.99 arc(66.36,82.31) R21.1
  BOTTOM w0.2: X3.A7 6.12,26.64 arc(6.62,26.97) 7.21,27.09 8.48,27.09 arc(9.06,26.97) 9.56,26.64 X3.C7
O_PRD: length 45.9
  TOP w0.2: X3.C1 9.56,9.76 arc(9.06,9.43) 8.48,9.31 7.21,9.31 arc(6.62,9.43) 6.12,9.76 X3.A1
  TOP w0.5: X3.C1 32.47,10.58 arc(35.29,11.14) 37.69,12.74 39.59,14.64 arc(40.07,14.96) 40.63,15.07 R14.1
  BOTTOM w0.2: X3.A1 6.12,9.76 arc(6.62,9.43) 7.21,9.31 8.48,9.31 arc(9.06,9.43) 9.56,9.76 X3.C1
O_PRM: length 50.4
  TOP w0.2: X3.A2 6.12,12.3 arc(6.62,11.97) 7.21,11.85 8.48,11.85 arc(9.06,11.97) 9.56,12.3 X3.C2
  TOP w0.5: X3.C2 30.07,13.12 arc(31.59,13.42) 32.88,14.29 42.32,23.72 arc(42.65,24.22) 42.77,24.8 R13.1
  BOTTOM w0.2: X3.C2 9.56,12.3 arc(9.06,11.97) 8.48,11.85 7.21,11.85 arc(6.62,11.97) 6.12,12.3 X3.A2
PRM2: length 110.1
  TOP w0.2: X3.A6 6.12,24.1 arc(6.62,24.43) 7.21,24.55 8.48,24.55 arc(9.06,24.43) 9.56,24.1 X3.C6
  TOP w0.5: VD12.1 52.51,73.98 arc(50.81,73.64) 49.36,72.67 46.65,69.97 arc(45.66,68.47) 45.31,66.71 45.31,52.74 arc(44.95,50.98) 43.96,49.49 18.8,24.33 arc(17.63,23.55) 16.26,23.28 X3.C6
  TOP w1: VD12.1 54.83,73.98 arc(55.68,74.15) 56.39,74.63 58.23,76.47 arc(58.42,76.59) VD9.2 59.59,76.64 arc(60.11,76.53) 60.55,76.24 arc(61.12,75.85) 61.8,75.72 C10.1 64.36,75.72 arc(65.55,75.48) 66.56,74.8 R22.1 67.04,69.69 arc(67,69.5) 66.89,69.34 66.51,68.96 arc(66.4,68.8) 66.37,68.61 S3.4 S3.3
  BOTTOM w0.2: X3.A6 6.12,24.1 arc(6.62,24.43) 7.21,24.55 8.48,24.55 arc(9.06,24.43) 9.56,24.1 X3.C6
PUSK1: length 148.7
  TOP w0.2: X3.C23 9.56,67.28 arc(9.06,67.61) 8.48,67.73 7.21,67.73 arc(6.62,67.61) 6.12,67.28 X3.A23
  TOP w0.5: C1.1 24.98,153.71 arc(24.52,151.36) 23.19,149.37 arc(22.66,148.8) 22.18,148.18 arc(21.44,147.06) 21.18,145.74 21.18,78.3 arc(20.68,75.81) 19.27,73.7 12.29,66.71 arc(12,66.53) 11.67,66.46 X3.C23
  TOP w1: 37.69,153.07 37.69,150.53 arc(37.13,149.19) 35.78,148.63 S1.2 ; 37.69,153.07 VD15.2 ; 37.69,153.07 arc(37.57,152.49) 37.24,151.99 arc(36.33,151.38) 35.25,151.17 S1.1 ; VD15.2 29.42,155.85 arc(29.08,155.92) R24.2 27.32,156.11 27.29,156.13 C1.1 ; VD15.2 48.25,155.85 arc(48.72,155.94) R8.1
  BOTTOM w0.2: X3.A23 6.12,67.28 arc(6.62,67.61) 7.21,67.73 8.48,67.73 arc(9.06,67.61) 9.56,67.28 X3.C23
PUSK2: length 111
  TOP w0.2: X3.A9 6.12,31.72 arc(6.62,32.05) 7.21,32.17 8.48,32.17 arc(9.06,32.05) 9.56,31.72 X3.C9
  TOP w0.5: X3.C9 16.73,30.9 arc(17.67,31.09) 18.47,31.62 19,32.16 38.32,51.47 arc(39.26,52.88) 39.59,54.54 39.59,76.24 arc(39.94,78) 40.94,79.49 54.83,93.38 55.85,94.4 arc(56.25,94.67) 56.74,94.77 C11.1
  TOP w1: C11.1 60.87,94.77 arc(62.07,95.01) VD6.2 64.73,95.69 arc(66.36,95.01) R3.1
  BOTTOM w0.2: X3.A9 6.12,31.72 arc(6.62,32.05) 7.21,32.17 8.48,32.17 arc(9.06,32.05) 9.56,31.72 X3.C9
STOP1: length 129.9
  TOP w0.2: X3.A20 6.12,59.66 arc(6.62,59.99) 7.21,60.11 8.48,60.11 arc(9.06,59.99) 9.56,59.66 X3.C20
  TOP w0.5: C2.1 24.98,126.67 arc(24.82,125.84) 24.35,125.13 arc(24.18,124.96) 24.02,124.77 arc(23.32,123.74) 23.08,122.51 23.08,72.58 arc(22.58,70.09) 21.18,67.98 12.29,59.09 arc(12,58.91) 11.67,58.84 X3.C20
  TOP w1: 37.69,126.4 VD16.2 37.69,129.33 ; 37.69,126.4 37.69,123.86 arc(37.13,122.52) 35.78,121.96 S2.2 ; 37.69,126.4 arc(37.57,125.82) 37.24,125.32 arc(36.33,124.71) 35.25,124.5 S2.1 ; 37.69,129.33 39.19,129.33 arc(39.33,129.36) 39.44,129.44 arc(39.55,129.51) 39.69,129.54 R10.1 ; 37.69,129.33 33.99,129.33 arc(33.98,129.33) 33.98,129.33 R25.2 27.32,129.44 27.29,129.46 C2.1
  BOTTOM w0.2: X3.A20 6.12,59.66 arc(6.62,59.99) 7.21,60.11 8.48,60.11 arc(9.06,59.99) 9.56,59.66 X3.C20
STOP2: length 108.6
  TOP w0.2: X3.C8 9.56,29.18 arc(9.06,29.51) 8.48,29.63 7.21,29.63 arc(6.62,29.51) 6.12,29.18 X3.A8
  TOP w0.5: X3.C8 16.73,28.36 arc(17.67,28.55) 18.47,29.08 18.84,29.45 40.23,50.84 arc(41.16,52.25) 41.5,53.91 41.5,75.6 arc(41.77,76.99) 42.56,78.16 43.29,78.89 52.18,87.78 arc(53.89,88.93) 55.92,89.34 VD7.2
  TOP w1: R4.1 66.56,87.5 arc(65.55,88.18) 64.36,88.42 61.8,88.42 arc(61.12,88.55) 60.55,88.94 arc(60.11,89.23) 59.59,89.34 VD7.2
  BOTTOM w0.2: X3.A8 6.12,29.18 arc(6.62,29.51) 7.21,29.63 8.48,29.63 arc(9.06,29.51) 9.56,29.18 X3.C8
N205916: length 5.7
  TOP w0.5: R18.2 R20.2 66.93,19.93 arc(67.2,19.88) S5.1
N206064: length 4.9
  TOP w0.5: AV2.2 45.94,18.45 arc(45.66,18.4) 45.42,18.24 arc(45.18,18.08) 44.9,18.02 R14.2
N208529: length 5.7
  TOP w0.5: R17.2 R19.2 66.93,35.17 arc(67.2,35.12) S4.1
N208613: length 8.3
  TOP w0.5: AV1.2 46.58,33.69 arc(45.68,33.32) 45.31,32.42 45.31,30.52 arc(45.19,29.93) 44.86,29.43 44.67,29.25 arc(44.19,28.93) 43.63,28.82 42.77,28.82
N217263: length 16.4
  TOP w0.5: R15.2 53.83,59.93 arc(54.03,59.97) VD10.2 55.8,60.08 arc(56.99,60.32) 58.01,61 59.28,62.27 arc(59.74,62.97) 59.91,63.8 59.91,66.71 arc(59.54,67.61) 58.64,67.98 S3.1
N217275: length 6
  TOP w0.5: R16.2 53.83,66.28 arc(54.03,66.32) VD11.2 55.24,66.43 arc(55.71,66.34) 56.1,66.08 56.36,65.82 arc(56.78,65.54) S3.2
N235918: length 7.6
  TOP w0.5: VT1.3 60.99,206.86 arc(61.04,207.11) VD1.1 62.78,207.33 arc(63.98,207.09) 64.99,206.41
N246818: length 19.6
  TOP w1: R7.1 R8.2 47.51,151.21 47.47,151.17 S1.4
N246834: length 7.7
  TOP w1: S1.3 42.91,148.63 arc(43.8,148.26) 44.18,147.36 R23.1
N252394: length 19.6
  TOP w1: R9.1 R10.2 47.51,124.54 47.47,124.5 S2.4
N252398: length 7.7
  TOP w1: S2.3 42.91,121.96 arc(43.8,121.59) 44.18,120.69 R26.1
N261995: length 7.4
  TOP w0.5: R6.1 R5.1 arc(54.36,205.46) 54.56,205.5 VD25.2 arc(57.48,205) 58.37,204.82 VT1.1

## Copper pours and planes (outline as drawn; the poured copper is in the pictures)
GNDK on BOTTOM: 2.12,3.71 2.27,3.36 2.62,3.21 91.8,3.21 92.15,3.36 92.3,3.71 92.3,12.24 92.44,12.59 92.8,12.74 100.05,12.74 100.4,12.89 100.55,13.24 100.55,220.52 100.4,220.87 100.05,221.02 92.8,221.02 92.44,221.17 92.3,221.52 92.3,229.41 92.15,229.76 91.8,229.91 2.62,229.91 2.27,229.76 2.12,229.41 ; 1 cut-out

## Text on the board
Ref Des/Silkscreen Top: 220B | 110B | 24B | Open collector | Cyx.KOHTAKT | 15B | 6B | PUSK1 | STOP1 | OSC PRM | OSC PRD | PRM2
DISPLAY_TOP: 220B | 110B | 24B | Open collector | Cyx.KOHTAKT | 15B | 6B | PUSK1 | STOP1 | OSC PRM/PRD | PRM2
User.6: FIGURE | SIZE | 0.5 | 1.0 | 1.3 | 2.0 | 2.7 | DRILL CHART: TOP to BOTTOM | ALL UNITS ARE IN MILLIMETERS | PLATED | NON-PLATED | QTY | 53 | 96 | 16 | 30 | 2
